# Altium PCB New_PCB.PcbDoc
Units mil, origin at the board's own origin, x right, y up, seen from the top; angles counter-clockwise.
Board outline 5757.44 x 3142.58 mil, 2 copper layers (Top Layer, GND); 17 components, 8 nets, 39 pads, 5 vias.
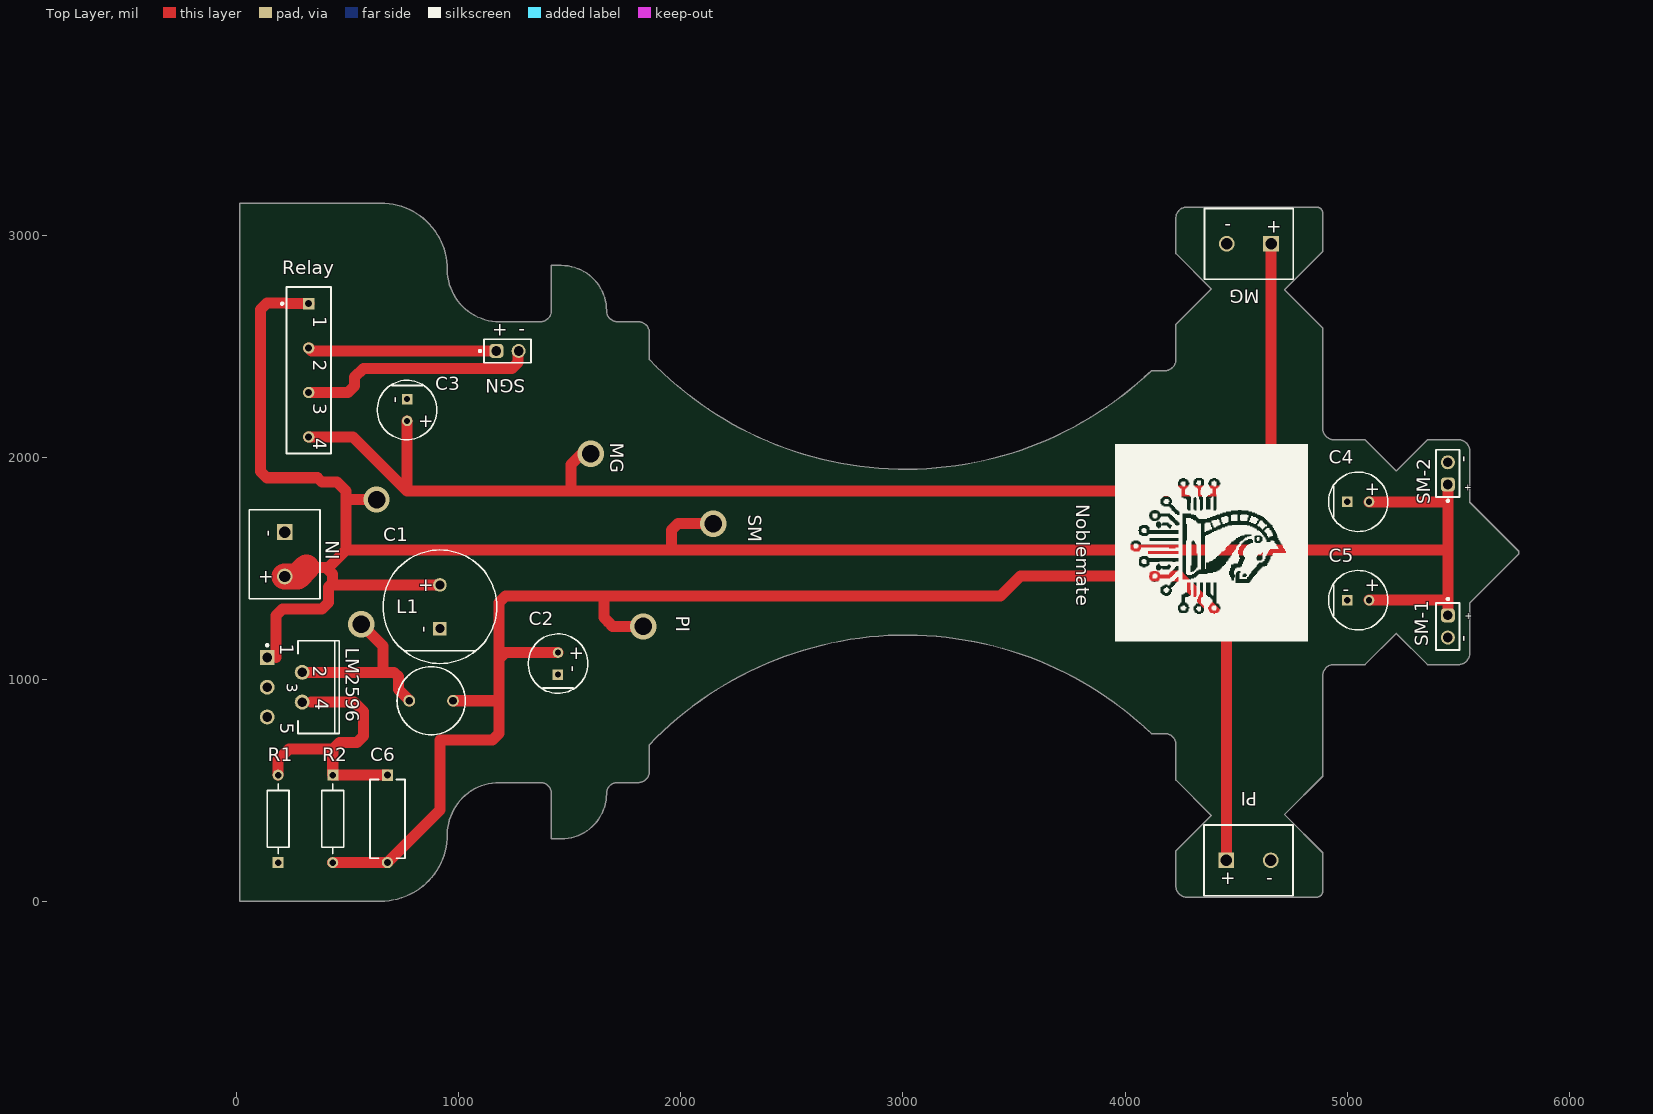
[diagram p0: Top Layer view]
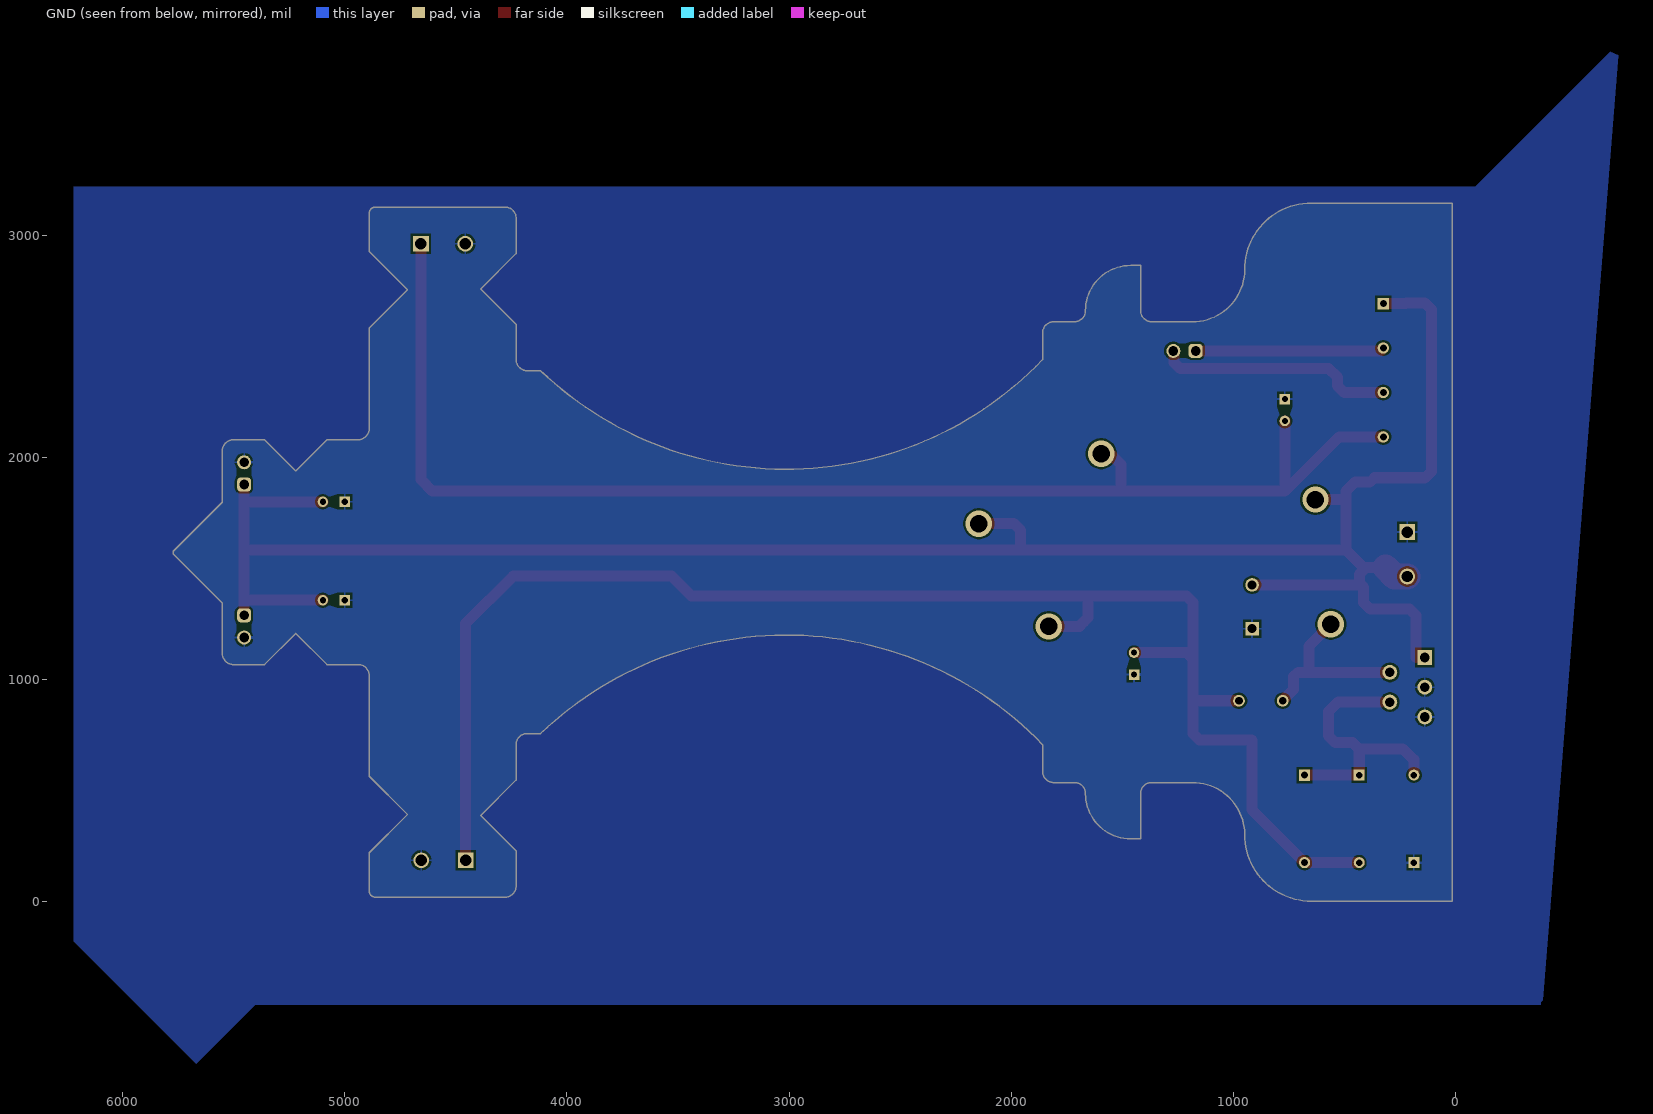
[diagram p1: GND view, seen from below]
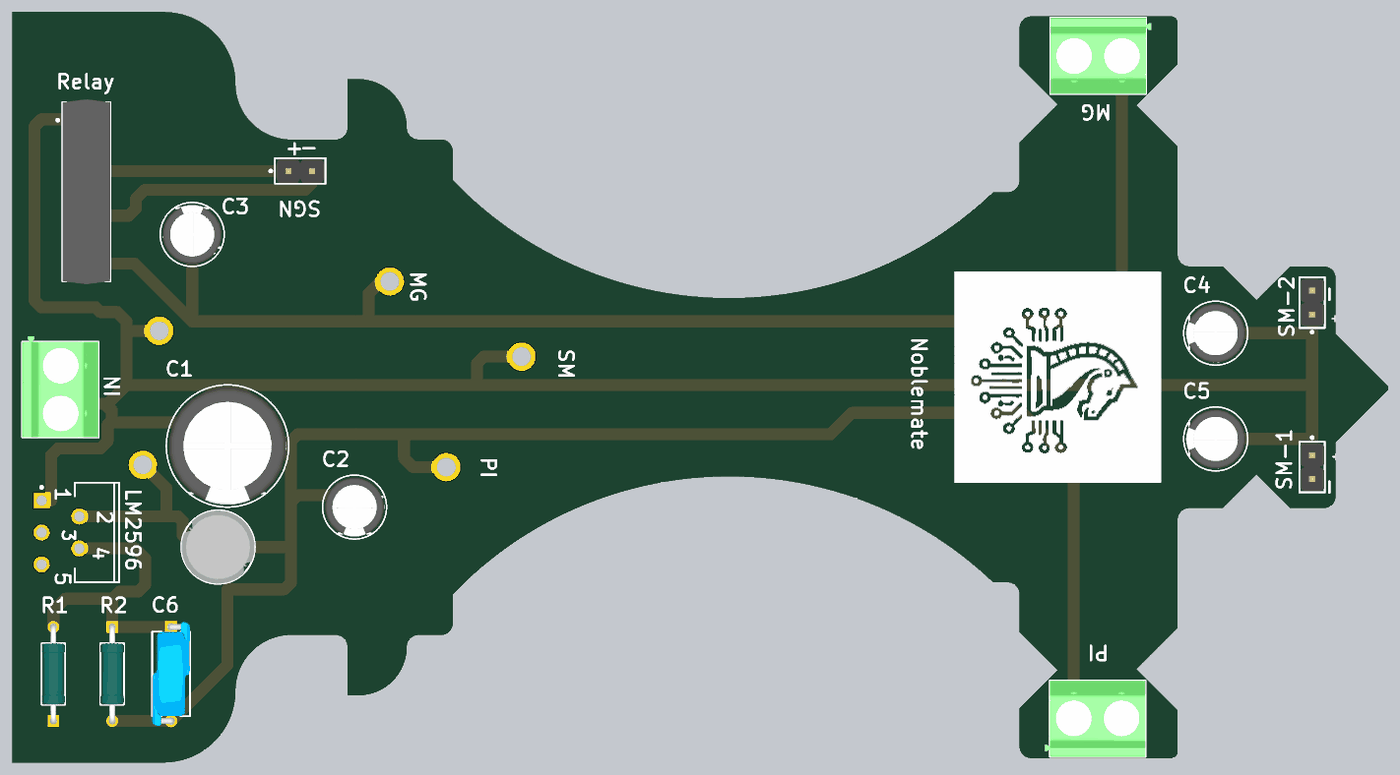
[diagram p2: 3D render of the assembled board from above, using the file's embedded part models]

## Layer stack, top to bottom
Top Solder: solder mask 0.4, Solder Resist, Dk 3.5
Top Layer: signal copper 1.4
Dielectric 1: dielectric 12.6, FR-4, Dk 4.8
GND: signal copper 1.4
Bottom Solder: solder mask 0.4, Solder Resist, Dk 3.5

## Board outline
14.21,3.37 14.21,3145.94 648.99,3145.94 cw(c648.99,2846.11) 948.82,2846.11 ccw(c1183.02,2846.11) 1183.02,2611.91 1367.32,2611.91 ccw(c1367.32,2661.91) 1417.32,2661.91 1417.32,2865.06 1462.2,2865.06 cw(c1462.2,2661.91) 1665.35,2661.91 ccw(c1715.35,2661.91) 1715.35,2611.91 1808.27,2611.91 cw(c1808.27,2561.91) 1858.27,2561.91 1858.27,2441.44 ccw(c3013.19,3546.36) 4118.11,2391.44 4178.35,2391.44 ccw(c4178.35,2441.44) 4228.35,2441.44 4228.35,2600.57 4387.47,2759.7 4228.35,2918.82 4228.35,3077.95 cw(c4278.35,3077.95) 4278.35,3127.95 4862.2,3127.95 cw(c4862.2,3100.39) 4889.76,3100.39 4889.76,2928.15 4717.52,2755.91 4889.76,2583.66 4889.76,2130.71 ccw(c4939.76,2130.71) 4939.76,2080.71 5080.12,2080.71 5220.47,1940.35 5360.83,2080.71 5501.18,2080.71 cw(c5501.18,2030.71) 5551.18,2030.71 5551.18,1798.84 5771.65,1578.37 5771.65,1565.82 5551.18,1345.35 5551.18,1118.61 cw(c5501.18,1118.61) 5501.18,1068.61 5360.83,1068.61 5220.47,1208.96 5080.12,1068.61 4939.76,1068.61 ccw(c4939.76,1018.61) 4889.76,1018.61 4889.76,565.65 4717.52,393.41 4889.76,221.16 4889.76,48.92 cw(c4862.2,48.92) 4862.2,21.36 4278.35,21.36 cw(c4278.35,71.36) 4228.35,71.36 4228.35,230.49 4387.47,389.62 4228.35,548.75 4228.35,707.87 ccw(c4178.35,707.87) 4178.35,757.87 4118.11,757.87 ccw(c3013.19,-397.05) 1858.27,707.87 1858.27,587.4 cw(c1808.27,587.4) 1808.27,537.4 1715.35,537.4 ccw(c1715.35,487.4) 1665.35,487.4 cw(c1462.2,487.4) 1462.2,284.25 1417.32,284.25 1417.32,487.4 ccw(c1367.32,487.4) 1367.32,537.4 1183.02,537.4 ccw(c1183.02,303.2) 948.82,303.2 cw(c648.99,303.2) 648.99,3.37

## Design rules (kind name [scope] priority, off if disabled: settings)
Clearance [All] p1: gap=10 ignorepadtopadclearanceinfootprint=FALSE
PolygonConnect [All] p1: connectstyle=Relief reliefconductorwidth=10 reliefentries=4 polygonreliefangle="90 Angle" airgapwidth=10
RoutingVias [InNet('GND')] p1: holewidth=78.74 width=118.11 viastyle="Through Hole" minholewidth=5 minwidth=5 maxholewidth=80 maxwidth=120
SolderMaskExpansion [All] p1: expansion=4 istentingtop=FALSE
SupplyNets "Schematic Supply Nets" [InNet('GND')] p1: voltage=0.000
Width [All] p1: maxlimit=118.11 minlimit=39.37 preferedwidth=50
30 further rules are at their usual default settings.

## Components (designator, comment, footprint, x,y, rotation, side; value= is the part's Value field where it differs from the comment)
C1 "EEUFR1H681L" FP-RAD-TH-D_12_5_0_5-L_30-MFG 915.35,1328.74 r90 top
C2 "EEUFR1E101B" FP-RAD-TH-D_6_3_0_5-L_11-MFG 1446.85,1072.83 r90 top
C3 "EEUFR1E101B" FP-RAD-TH-D_6_3_0_5-L_11-MFG 767.72,2214.57 r270 top
C4 "EEUFR1E101B" FP-RAD-TH-D_6_3_0_5-L_11-MFG 5049.21,1801.18 r0 top
C5 "EEUFR1E101B" FP-RAD-TH-D_6_3_0_5-L_11-MFG 5049.21,1358.27 r0 top
C6 "DE1E3RA222MN4AN01F" FP-DE1_D9_T4_F10_d0_6-0_0-MFG 679.13,374.02 r270 top
IN "1729128" PHOE-1729128-2_V 216.54,1564.96 r270 top
L1 "744772390" WE-TI-L 875.98,905.51 r0 top
LM2596 "LM2596T-ADJ/NOPB" NDH0005A 216.54,966.54 r270 top
MG "1729128" PHOE-1729128-2_V 4557.09,2962.6 r180 top (schematic designator HD3)
PI "1729128" PHOE-1729128-2_V 4555.51,187.01 r0 top (schematic designator "PI -5V")
R1 "MRS25000C1001FCT00" FP-MRS25-MFG 187.01,374.02 r90 top
R2 "MRS25000C1001FCT00" FP-MRS25-MFG 433.07,374.02 r270 top (schematic designator R?)
Relay "HE3621A2400" FP-HE3621A2400-MFG 324.8,2393.31 r0 top
SGN "61300211121" 61300211121 1219.69,2480.32 r0 top (schematic designator HD7)
SM-1 "61300211121" 61300211121 5452.76,1240.16 r270 top
SM-2 "61300211121" 61300211121 5452.76,1929.13 r90 top

## Footprints (in the part's own frame and the unit in brackets; to place one, negate y for a bottom-side part, rotate by r counter-clockwise, add the part's x,y. Pads: shape width x height; smd on the part's side, far side on the other; paste and mask are expansions set on the pad)
61300211121 [mm] "Pin Header, pitch 2.54 mm, THT, Vertical, single row, 2p"
  rrect50% 1.6x1.6 hole 1.1: 1(-1.27,0)
  round 1.6 hole 1.1: 2(1.27,0)
  silkscreen extent -3.26,-1.35 2.69,1.35, body extent -2.54,-1.27 2.54,1.27, height 8.57
FP-DE1_D9_T4_F10_d0_6-0_0-MFG [mm]
  rect 1.3x1.3 hole 0.8 paste-2539.97 mask+0: 1(-5,0)
  round 1.3 hole 0.8 paste-2539.97 mask+0: 2(5,0)
  silkscreen extent -4.5,-2 4.5,2, body extent -5.75,-2.1 5.75,2.1, height 0.25
FP-HE3621A2400-MFG [mm]
  rect 1.3x1.3 hole 0.8 paste-2539.97 mask+0: 1(0,7.62)
  round 1.3 hole 0.8 paste-2539.97 mask+0: 2(0,2.54) 3(0,-2.54) 4(0,-7.62)
  silkscreen extent -3.16,-9.53 2.54,9.53, body extent -2.64,-9.62 2.64,9.62, height 0.25
FP-MRS25-MFG [mm]
  rect 1.25x1.25 hole 0.75 paste-2539.97 mask+0: 1(-5,0)
  round 1.25 hole 0.75 paste-2539.97 mask+0: 2(5,0)
  silkscreen extent -3.98,-1.25 3.98,1.25, body extent -5.72,-1.35 5.72,1.35, height 0.25
FP-RAD-TH-D_6_3_0_5-L_11-MFG [mm]
  rect 1.2x1.2 hole 0.7 paste-2539.97 mask+0: 1(-1.25,0)
  round 1.2 hole 0.7 paste-2539.97 mask+0: 2(1.25,0)
  silkscreen extent -3.4,-3.4 3.4,3.4, body extent -3.5,-3.5 3.5,3.5, height 0.25
FP-RAD-TH-D_12_5_0_5-L_30-MFG [mm]
  rect 1.55x1.55 hole 1 paste-2539.97 mask+0: 1(-2.5,0)
  round 1.55 hole 1 paste-2539.97 mask+0: 2(2.5,0)
  silkscreen extent -6.5,-6.5 6.5,6.5, body extent -6.6,-6.6 6.6,6.6, height 0.25
NDH0005A [mm] "FM, 5-Leads, Body 10.6x4.7mm, Pitch 1.7mm"
  rect 1.7x1.7 hole 1.1: 1(-3.4,-2)
  round 1.7 hole 1.1: 2(-1.7,2) 3(0,-2) 4(1.7,2) 5(3.4,-2)
  silkscreen extent -5.3,-2.12 5.3,6.23, body extent -5.35,-2.31 5.35,6.28, height 21.1
PHOE-1729128-2_V [mm] "Receptacle, 2-Leads, Body 8.1x10.16mm, Pitch 5.08mm"
  rect 1.8x1.8 hole 1.3: 1(-2.54,0)
  round 1.8 hole 1.3: 2(2.54,0)
  silkscreen extent -5.08,-4.05 5.08,4.05, body extent -5.65,-4.05 5.08,4.05, height 10.01
WE-TI-L [mm] "THT Inductor, 2-Leads, Body 7.8 x 7.8 mm"
  round 1.35 hole 0.9: 1(-2.5,0) 2(2.5,0)
  silkscreen extent -3.9,-3.9 3.9,3.9, body extent -3.9,-3.9 3.89,3.9, height 9.5

## Part data
C1: library part CMP-05427-000465-1, "Aluminum Electrolytic Capacitors (Radial Lead Type) 680uF ±20% 50V"
C2 C3 C4 C5: library part CMP-05427-000897-1, "Aluminum Electrolytic Capacitors (Radial Lead Type) 100uF ±20% 25V", Capacitance=100uF, Case/Package=Radial, ESR (Equivalent Series Resistance)=130mR, Max Operating Temperature=105°C, Min Operating Temperature=-40°C, Package Quantity=2000, Ripple Current=455mA, Tolerance=20%, Voltage Rating=25V, Diameter=6.3mm, Features="General Purpose", Height=11.2mm, Height - Seated (Max)=0.441inch, Impedance=130mR, Lead Diameter=0.5mm, Lead Free="Lead Free", Lead Pitch=5mm, Length=11.2mm, Life (Hours)=2000Hour, Mount="Through Hole", Packaging="Tape and Reel", Polarity=Polar, Radiation Hardening=No, RoHS Compliant=Yes, Series=FR, Termination=Radial, Voltage Rating (DC)=25V
C6: library part CMP-06035-032365-1, "Cap Ceramic Disc 2200pF 20% 250VAC Thru-Hole 9.0x4.0x10.0 Ammo pack", Capacitance=2.2nF, Case/Package=Radial, Max Operating Temperature=125°C, Min Operating Temperature=-40°C, Ratings=X1, Tolerance=20%, Voltage Rating=250V, Lead/Base Style=Straight, Mount="Through Hole", Packaging="Cut Tape"
IN MG PI: library part CMP-2000-05815-1, "PCB Terminal Block, 13.5 A, 400 V, 2-Pin THD, RoHS, Bulk", Current Rating=13500mA, Manufacturer="Phoenix Contact", Package Description="2-Pin Through Hole Device, Body 8.1 x 10.16 mm, Pitch 5.08 mm", Package Reference=1729128-2, Package Version=03/2015, Voltage Rating=400V, Datasheet URL=https://datasheet.ciiva.com/16046/1729128-16046181.pdf, Datasheet Version=12/2013, Manufacturer URL=http://www.phoenixcontact.com/, Mounting Technology=ThroughHole, No. of Positions=2, No. of Rows=1, Orientation=Horizontal, Package URL=https://www.phoenixcontact.com/online/portal/pi/pxc/product_detail_page/!ut/p/b1/3VdJjqNKFDxLH8AFycySyWY2ozFsEPOMMQaDOX1XedGL_1Vdm5YXJleknhSKeBkvI6EA8ncAo3AYoDhBQGco6KN7VURTdemj9us_IEKEZo_YHiPAEWEFmDGOHMORkqKYCORBZxgL7ZoaZYcbFFUZ3fqxSY6GOuxydWUuHqz1ynmMFygu583Bob0Ewr6Sd_l-5m-kAueHiB0jpRwZwe58wwtkpxtMYd_LmGcDRU02dRNEyWt6Y2ti5pSyJ_reIkzIulrqApdnbT11V5jnCKbYNCvhEM1MCpPByat_X379-iThf08CI5GfOPqfBeS3BRoBOdD55AKVv0iLwCMq-2BrzXWSGRH7pUGD9uwXQjiph3xL0DKQwdGa0JImiIOmBNOestqgwTHSSs2oOep-78apyXQBvNi8ZLaFjvjWvcaUEBu0MC6Wbe-d6mB0FAebo2lUWinqYaZs5DAYzV0RP9yitUjnGJ0iI9xhZkT42OCQNUJJhkgWINNQLP2JFP6OpMg3JCVg70jqHT0lvKOnhHf0lPuOnnLf0VPuWx6_dxwUIvwk5WMkT0kLL1mh61l2yZVSzG3pYV_bqo-mj6uMKwKwdnnW8Jh5RTOJzMOA5c-eJDaZQw4mTMPH02PvS_ZAqNVjVTo2WyYLkwH_KU1mmmG5kjRhDqPXLwwVHvVOjCM60-fpXvTDfMGW1PVFVS1r4e4yVDk4ZdNbkUHvqPqQSeian4UD39fNKmachqdJ1NJbyk8rXT9mXTvPk3oE5meulKGgiruPJek-4I9hTT6G8ZLOyRSm2RRVbThERQad5OS28hdt4YW4vG0stgYYzsWsK4_7y6DZMjJSCqri1kyiZR5vD7pwIrNR7QwPHTcLTI5qT7eRlpHrdGiupYlqQDJ7zy_CND8fWWBoLRXxk1RVcXiBQwbTD4Xi7KL-FuO94t9xaqweXzH, Packing=Bulk, PartNumber=1729128, Pitch=5.08mm, RoHS=TRUE
L1: library part CMP-0225-00043-1, "Radial Leaded Wire Wound Inductor WE-TI, L = 39.0 µH", Inductance="39.0 ÂµH", ComponentLink1Description="Manufacturer Link", ComponentLink1URL=http://www.we-online.com, ComponentLink2Description=Datasheet, ComponentLink2URL=http://www.we-online.de/katalog/media/pdf/744772390.pdf, DatasheetVersion="ver 8, Oct-2009", PackageDescription="THT Inductor, 2-Leads, Body 7.8 x 7.8 mm", PackageReference=WE-TI-L, PackageVersion=2006
LM2596: library part CMP-0069-01928-3, "SIMPLE SWITCHER® Power Converter 150 KHz 3A Step-Down Voltage Regulator, 5-pin TO-220, Pb-Free", Manufacturer="Texas Instruments", PackageTopMarking="NSUZXYTTE#*LM2596T*-ADJ P+", PowerWise=N, ComponentLink1Description="Datasheet URL", ComponentLink1URL=http://www.ti.com/general/docs/lit/getliterature.tsp?genericPartNumber=LM2596&fileType=pdf, CompType=Switcher, PackageDescription="TO-220, Molded, Stagger Bend, 5 Lead", PackageReference=NDH0005A, PinCount=5, RoHS=Y
R1 R2: library part CMP-02408-000051-1, "RES 1K OHM 0.6W 1% AXIAL", Case/Package=Axial, Max Operating Temperature=155°C, Max Power Dissipation=600mW, Min Operating Temperature=-55°C, Package Quantity=5000, Resistance=1kR, Resistance Tolerance=1%, Resistor Type="Metal Film", Temperature Coefficient=50ppm/°C, Voltage Rating=350V, Construction=Cylindrical, Contact Plating=Tin, Diameter=2.5mm, Lead Diameter=0.6mm, Lead Free="Lead Free", Length=6.5mm, Military Standard=Not, Mount="Through Hole", Number of Pins=2, Number of Terminations=2, Packaging="Tape and Reel", Power Rating=600mW, Radiation Hardening=No, RoHS Compliant=Yes, Series=MRS25, Technology="THIN FILM", Termination=Axial, Tolerance=1%, Voltage Rating (DC)=350V, Weight=0.00776oz, Width=2.5mm
Relay: library part CMP-08622-000010-1, "RELAY REED SPST 500MA 24V", Case/Package=SIP, Coil Current=11.1mA, Coil Resistance=2.15kR, Coil Voltage (DC)=24V, Contact Current Rating=500mA, Max Operating Temperature=85°C, Min Operating Temperature=-40°C, Package Quantity=25, Ratings=IP67, Switching Capacity=10W, Voltage Rating (DC)=200V, Coil Type=Non-Latching, Depth=5.08mm, Height=7.87mm, Lead Free="Lead Free", Length=19.05mm, Mount="Through Hole", Number of Pins=4, Operate Time=1ms, Packaging=Bulk, Radiation Hardening=No, REACH SVHC="No SVHC", Relay Type=Reed, Release Time=1ms, RoHS Compliant=Yes, Series=HE3600, Switching Current=500mA, Termination="PC Pin", Throw Configuration=SPST, Width=5.65mm
SGN SM-1 SM-2: library part CMP-1712-00002-6, Color=Black, Contact Resistance=20mΩ, Current Rating=3A, Max Operating Temperature=125°C, Min Operating Temperature=-40°C, Operating Supply Voltage=250V, Connector Type="Male Pin", Contact Gender=Male, Contact Material=Copper, Contact Mating Length=5.9944mm, Contact Plating=Gold, Gender=Male, Height=8.94mm, Housing Material=PBT, Lead Free="Lead Free", Lead Pitch=2.54mm, Mount="Through Hole", NexarPartId=20081794, Number of Contacts=2, Number of Pins=2, Number of Positions=2, Number of Rows=1, Orientation=Vertical, Packaging=Bulk, Pitch=2.54mm, REACH SVHC="No SVHC", RoHS=Compliant, Termination="Through Hole", Voltage Rating=250V

## Via types
v1: diameter 118.11, hole 78.74, Top Layer to GND, 5 vias

## Nets (pads, with @x,y where several pads share a name; then routed paths per layer and width w, separated by ;. In a path a pad name is that pad's centre, name@x,y a point inside that pad or via, vN(x,y) a via of type N, cw(c..) or ccw(c..) an arc to the next point about the centre after c; other vN are vias at no path point)
GND: C1.1 C2.1 C3.1 C4.1 C5.1 IN.1 LM2596.3 LM2596.5 MG.2 PI.2 R1.1 SM-1.2 SM-2.2 | length 7
  Top Layer w50: SM-1.2@5449.24,1190.16 SM-1.2 SM-1.2@5450.27,1187.67
NetC1_2: C1.2 C4.2 C5.2 IN.2 LM2596.1 Relay.1 SM-1.1 SM-2.1 | length 9781.4
  Top Layer w50: 177.17,1100.39 177.17,1289.61 206.45,1318.9 384.1,1318.9 413.39,1348.19 413.39,1417.32 423.23,1427.17 ; 314.96,1505.91 401.97,1505.91 ; Relay.1 324.21,2693.9 224.21,2693.9 221.26,2696.85 137.8,2696.85 108.27,2667.32 108.27,1938.74 137.56,1909.45 364.17,1909.45 383.86,1889.76 452.76,1889.76 492.13,1850.39 492.13,1811.02 ; v1(629.92,1811.02) 492.13,1811.02 ; C1.2 423.23,1427.17 ; v1(2145.67,1702.76) 1987.95,1702.76 1958.66,1673.47 1958.66,1594.49 1968.5,1584.65 ; C5.2 5452.76,1358.27 ; C4.2 5442.91,1801.18 5452.76,1791.34 ; SM-1.1 5452.76,1358.27 ; SM-2.1 5452.76,1791.34 ; 401.97,1505.91 413.39,1505.91 492.13,1584.65 ; 401.97,1505.91 431.26,1476.62 431.26,1435.19 423.23,1427.17 ; 492.13,1584.65 492.13,1811.02 ; 492.13,1584.65 1968.5,1584.65 ; 1968.5,1584.65 5452.76,1584.65 ; 5452.76,1358.27 5452.76,1584.65 ; 5452.76,1584.65 5452.76,1791.34
  Top Layer w118.11: IN.2 274.02,1464.96 314.96,1505.91
NetC2_2: C2.2 C6.2 L1.2 PI.1 R2.2 | length 7019
  Top Layer w50: R2.2 C6.2 915.35,413.39 915.35,728.35 1151.81,728.35 1181.1,757.64 1181.1,905.51 ; L1.2 1181.1,905.51 ; C2.2 1210.39,1122.05 1181.1,1092.76 ; v1(1830.71,1240.16) 1692.91,1240.16 1673.28,1259.79 1653.54,1279.53 1653.54,1377.95 ; PI.1 4455.51,1253.15 4241.18,1467.48 3528.3,1467.48 3438.77,1377.95 1653.54,1377.95 ; 1181.1,905.51 1181.1,1092.76 ; 1181.1,1092.76 1181.1,1348.66 1210.39,1377.95 1653.54,1377.95
NetC3_2: C3.2 MG.1 Relay.4 | length 6057.5
  Top Layer w50: Relay.4 524.8,2093.31 767.72,1850.39 ; C3.2 767.72,1850.39 ; v1(1594.49,2017.72) 1555.12,2017.72 1505.91,1968.5 1505.91,1850.39 ; MG.1 4657.09,1900.94 4606.54,1850.39 1505.91,1850.39 ; 767.72,1850.39 1505.91,1850.39
NetC6_1: C6.1 LM2596.4 R1.2 R2.1 | length 1224.5
  Top Layer w50: R1.2 187.01,639.76 236.22,688.98 433.07,688.98 ; 334.65,899.61 527.8,899.61 570.87,856.54 570.87,747.79 541.58,718.5 462.6,718.5 433.07,688.98 ; C6.1 R2.1 433.07,688.98
NetL1_1: L1.1 LM2596.2 | length 827.2
  Top Layer w50: LM2596.2 659.45,1033.46 ; v1(561.02,1250) 659.45,1151.57 659.45,1033.46 ; L1.1 777.56,906.36 728.29,955.63 728.29,1013.83 708.66,1033.46 659.45,1033.46
NetRelay_2: Relay.2 SGN.1 | length 850.3
  Top Layer w50: Relay.2 325.12,2493.31 338.12,2480.32 SGN.1
NetRelay_3: Relay.3 SGN.2 | length 1074.5
  Top Layer w50: Relay.3 502.21,2293.31 531.5,2322.6 531.5,2362.2 570.87,2401.57 1240.4,2401.57 1267.2,2428.38 1267.2,2477.83 SGN.2

## Polygon pours and split planes (outlines as drawn)
GND on GND "GND_L02_P007" (solid, pour order 7): -738.19,3868.11 -88.58,3218.5 6220.47,3218.5 6220.47,-177.17 5669.29,-728.35 5403.54,-462.6 -383.86,-462.6 -383.86,-452.76 -393.7,-442.91
GND on GND "GND_L02_P005" (solid, pour order 5): 1279.53,1938.98 2381.89,1938.98 2588.58,1732.28 4901.57,1732.28 4901.57,1358.27 4862.2,1318.9 1289.37,1318.9
GND on GND "GND_L02_P000" (solid, pour order 0): 30.13,2441.44 511.81,2460.63 1387.8,2460.63 1387.8,1338.58 1619.09,1107.28 639.76,127.95 30.13,127.95
GND on GND "GND_L02_P006" (solid, pour order 6): 4389.76,2431.1 4409.45,2411.42 4803.15,2411.42 4803.15,1702.76 4763.78,1663.39 4311.02,1663.39 4311.02,2421.26 4320.87,2431.1 4803.15,2431.1 4803.15,2312.99 4793.31,2303.15 4803.15,2293.31 4803.15,1663.39 4763.78,1663.39 4803.15,1702.76 4803.15,2431.1
GND on GND "GND_L02_P004" (solid, pour order 4): 4862.2,1938.98 5393.7,1938.98 5393.7,1200.79 5246.06,1200.79 5216.54,1230.32 4862.2,1230.32
GND on GND "GND_L02_P001" (solid, pour order 1): 5531.5,1131.89 5364.17,1131.89 5364.17,2047.24 5521.65,2047.24

## Silkscreen, mask and mechanical layers (free items; w line width, h text height)
Top Overlay:
  drawing of 24 lines, arcs and shapes, not listed
  text "-" at 4478.19,3071.17 h60 r180
  text "+" at 4635.98,3011.81 h60
  text "1" at 344.65,2637.64 h60 r270
  text "-" at 1299.06,2598.73 h60 r180
  text "+" at 1151.73,2549.22 h60
  text "2" at 344.65,2440.79 h60 r270
  text "3" at 344.65,2243.94 h60 r270
  text "-" at 738.49,2244.25 h60 r90
  text "+" at 817.09,2135.83 h60
  text "4" at 344.65,2086.46 h60 r270
  text "MG" at 1683.23,2066.77 h60 r270
  text "-" at 5501.66,2007.72 h60 r270
  text "+" at 5526.65,1850.4 h30
  text "+" at 5078.9,1830.71 h60
  text "Noblemate" at 3779.68,1791.18 h60 r270
  text "SM" at 2303.31,1741.97 h60 r270
  text "-" at 167.63,1643.86 h60 r90
  text "+" at 98.58,1437.01 h60
  text "+" at 817.09,1397.64 h60
  text "+" at 5078.9,1397.64 h60
  text "-" at 4980.47,1377.65 h60
  text "PI" at 1978.5,1289.21 h60 r270
  text "+" at 5528.65,1271.69 h30
  text "-" at 866.45,1210.79 h60 r90
  text "-" at 5501.66,1200.63 h60 r270
  text "1" at 197.01,1161.26 h60 r270
  text "+" at 1496.22,1092.52 h60
  text "2" at 344.49,1062.99 h60 r270
  text "-" at 1535.74,1033.62 h60 r90
  text "3" at 226.54,984.09 h50 r270
  text "4" at 354.49,915.2 h60 r270
  text "5" at 197.01,806.93 h60 r270
  text "+" at 4429.29,78.74 h60
  text "-" at 4635.98,78.43 h60
Mechanical 1:
  lines w10: 14.21,3.37 402.76,3.37 648.99,3.37 ccw(c648.99,303.2) 948.82,303.2 cw(c1183.02,303.2) 1183.02,537.4 1367.32,537.4 cw(c1367.32,487.4) 1417.32,487.4 1417.32,284.25 1462.2,284.25 ccw(c1462.2,487.4) 1665.35,487.4 cw(c1715.35,487.4) 1715.35,537.4 1808.27,537.4 ccw(c1808.27,587.4) 1858.27,587.4 1858.27,592.52 1858.27,707.87 cw(c3013.19,-397.05) 4118.11,757.87 4178.35,757.87 cw(c4178.35,707.87) 4228.35,707.87 4228.35,548.75 4387.47,389.62 4228.35,230.49 4228.35,71.36 ccw(c4278.35,71.36) 4278.35,21.36 4862.2,21.36 ccw(c4862.2,48.92) 4889.76,48.92 4889.76,221.16 4717.52,393.41 4889.76,565.65 4889.76,737.9 4889.76,1018.61 cw(c4939.76,1018.61) 4939.76,1068.61 5080.12,1068.61 5220.47,1208.96 5360.83,1068.61 5501.18,1068.61 ccw(c5501.18,1118.61) 5551.18,1118.61 5551.18,1345.35 5771.65,1565.82 5771.65,1578.37 5551.18,1798.84 5551.18,2025.59 5551.18,2030.71 ccw(c5501.18,2030.71) 5501.18,2080.71 5360.83,2080.71 5220.47,1940.35 5080.12,2080.71 4939.76,2080.71 cw(c4939.76,2130.71) 4889.76,2130.71 4889.76,2411.42 4889.76,2583.66 4717.52,2755.91 4889.76,2928.15 4889.76,3100.39 ccw(c4862.2,3100.39) 4862.2,3127.95 4278.35,3127.95 ccw(c4278.35,3077.95) 4228.35,3077.95 4228.35,2918.82 4387.47,2759.7 4228.35,2600.57 4228.35,2441.44 cw(c4178.35,2441.44) 4178.35,2391.44 4118.11,2391.44 cw(c3013.19,3546.36) 1858.27,2441.44 1858.27,2556.79 1858.27,2561.91 ccw(c1808.27,2561.91) 1808.27,2611.91 1715.35,2611.91 cw(c1715.35,2661.91) 1665.35,2661.91 ccw(c1462.2,2661.91) 1462.2,2865.06 1417.32,2865.06 1417.32,2661.91 cw(c1367.32,2661.91) 1367.32,2611.91 1183.02,2611.91 cw(c1183.02,2846.11) 948.82,2846.11 ccw(c648.99,2846.11) 648.99,3145.94 402.76,3145.94 14.21,3145.94 14.21,20.09 14.21,3.37